# Altium PCB WS2812_20x30_3x4.PcbDoc
Units mm, origin at the board's own origin, x right, y up, seen from the top; angles counter-clockwise.
Board outline 91 x 81 mm, 2 copper layers (Top Layer, Bottom Layer); 96 components, 7 nets, 324 pads, 108 vias.
Unrouted connection lines stored in the file: 77.
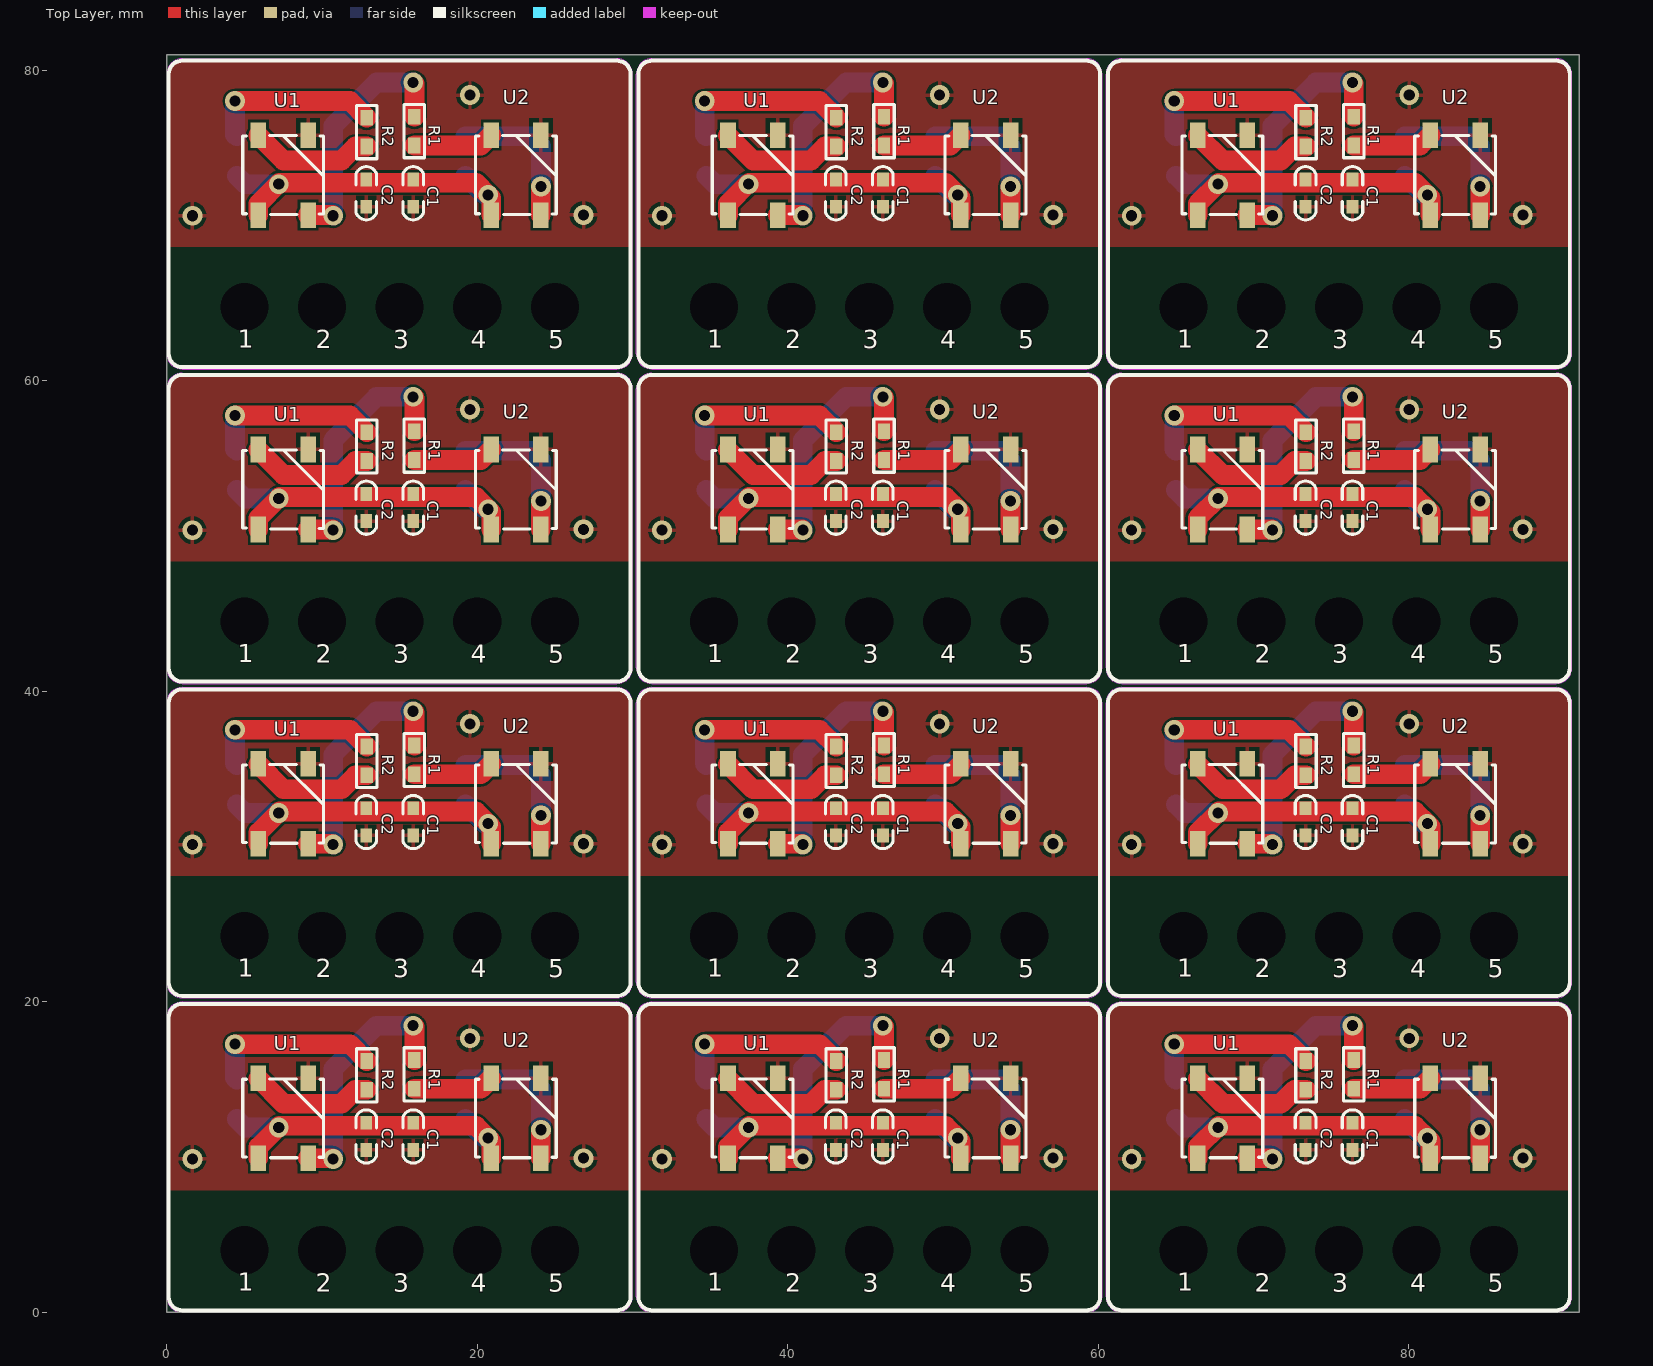
[diagram p0: Top Layer view]
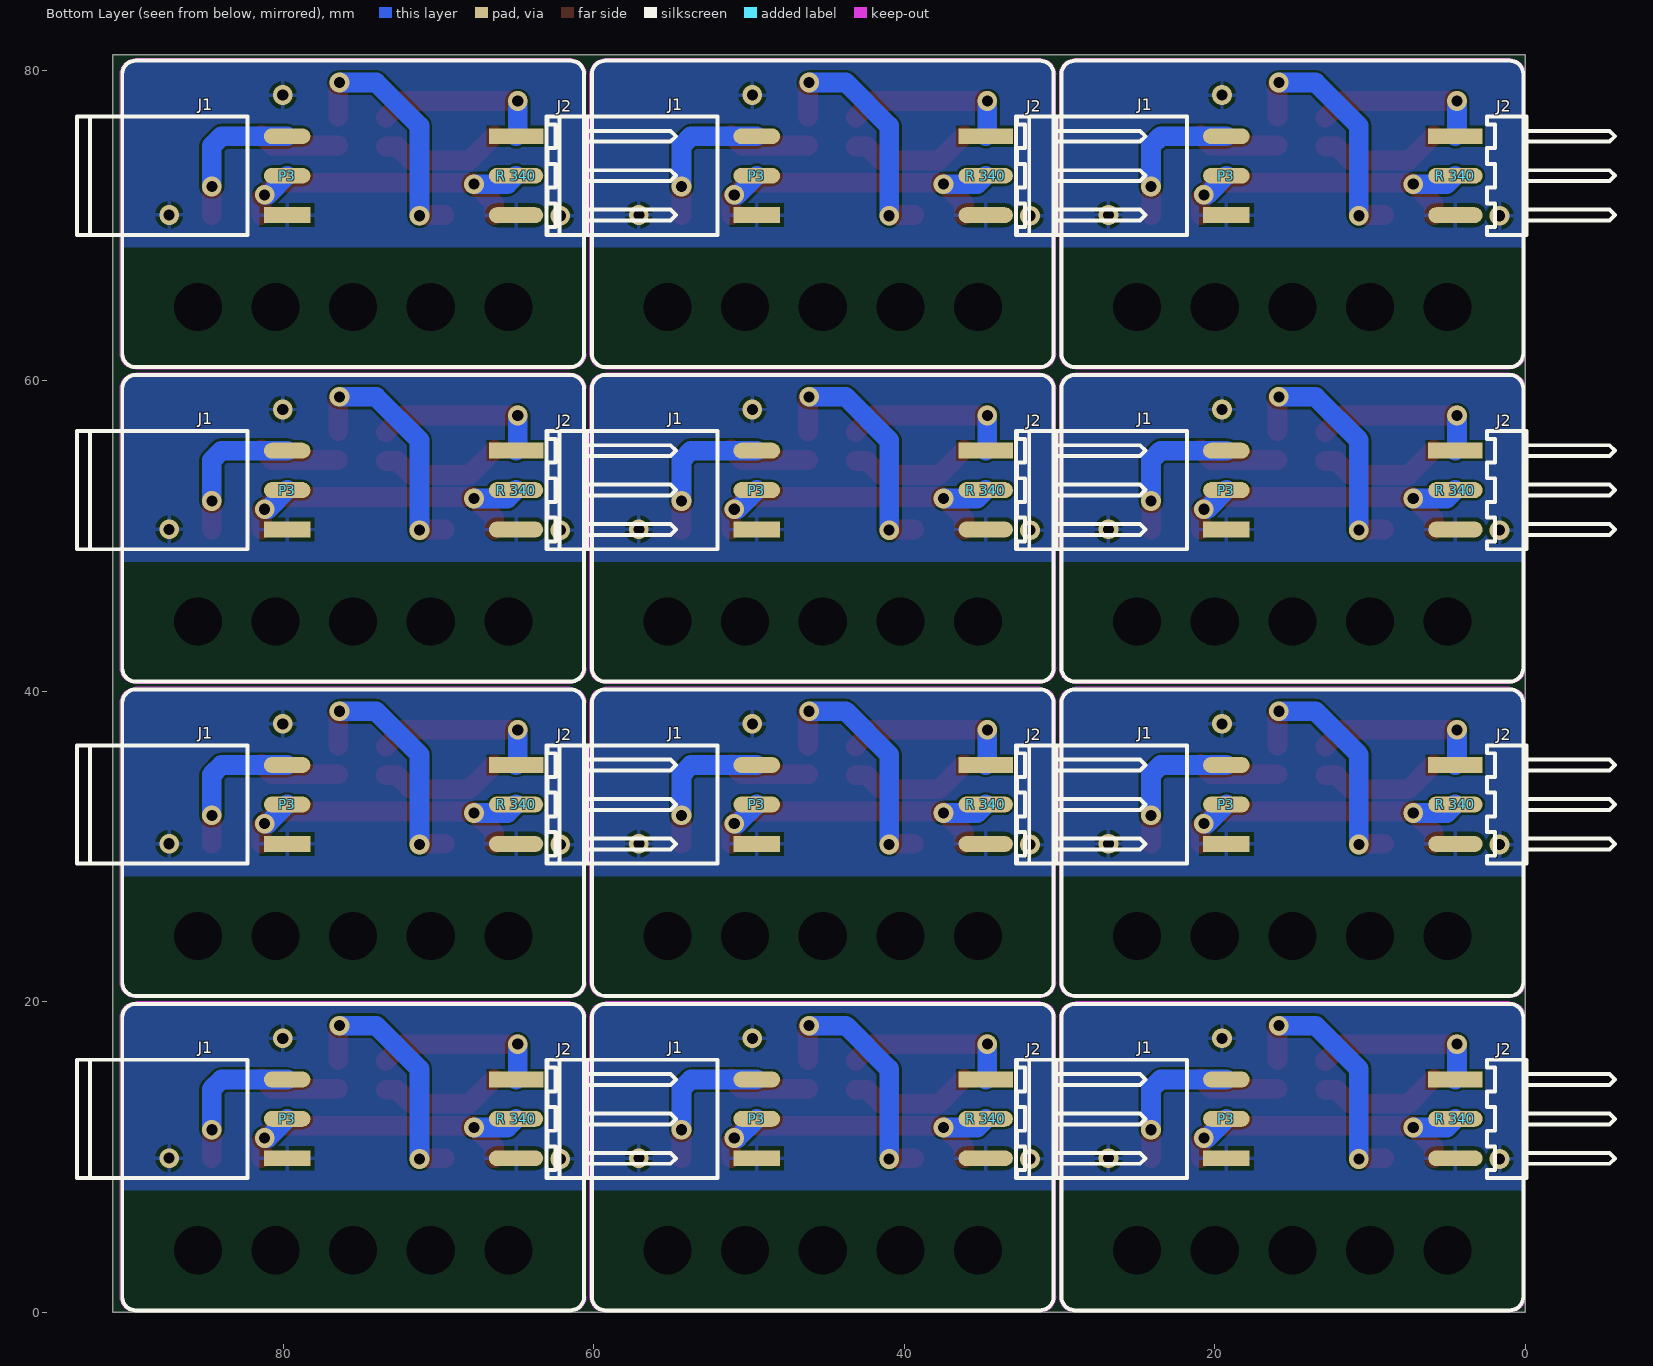
[diagram p1: Bottom Layer view, seen from below]

## Layer stack, top to bottom
Top Solder: solder mask 0.0102, Solder Resist, Dk 3.5
Top Layer: signal copper 0.0356
Dielectric 1: dielectric 0.32, FR-4, Dk 4.8
Bottom Layer: signal copper 0.0356
Bottom Solder: solder mask 0.0102, Solder Resist, Dk 3.5

## Board outline
0,0 0,81 91,81 91,0

## Design rules (kind name [scope] priority, off if disabled: settings)
Clearance [All] p1: gap=0.152
ComponentClearance [All] p1 off: gap=0 collisioncheckmode=3 verticalgap=2540 showdistances=FALSE
PolygonConnect [All] p1: connectstyle=Relief reliefconductorwidth=0.254 reliefentries=4 polygonreliefangle="90 Angle" airgapwidth=0.254
RoutingVias [All] p1: holewidth=0.711 width=1.27 viastyle="Through Hole" minholewidth=0.711 minwidth=1.27 maxholewidth=0.711 maxwidth=1.27
SilkToSilkClearance [All] p1: silktosilkclearance=0
SolderMaskExpansion [All] p1: expansion=0.102
Width [All] p1: maxlimit=2.54 minlimit=0.254 preferedwidth=0.254
28 further rules are at their usual default settings.

## Components (designator, comment, footprint, x,y, rotation, side; value= is the part's Value field where it differs from the comment)
C1 "Comment" "C 0603" 76.383,11.328 r270 top
C1 "Comment" "C 0603" 76.383,31.582 r270 top
C1 "Comment" "C 0603" 76.383,51.836 r270 top
C1 "Comment" "C 0603" 76.383,72.09 r270 top
C1 "Comment" "C 0603" 46.129,11.328 r270 top
C1 "Comment" "C 0603" 46.129,31.582 r270 top
C1 "Comment" "C 0603" 46.129,51.836 r270 top
C1 "Comment" "C 0603" 46.129,72.09 r270 top
C1 "Comment" "C 0603" 15.875,11.328 r270 top
C1 "Comment" "C 0603" 15.875,31.582 r270 top
C1 "Comment" "C 0603" 15.875,51.836 r270 top
C1 "Comment" "C 0603" 15.875,72.09 r270 top
C2 "Comment" "C 0603" 73.36,11.328 r270 top
C2 "Comment" "C 0603" 73.36,31.582 r270 top
C2 "Comment" "C 0603" 73.36,51.836 r270 top
C2 "Comment" "C 0603" 73.36,72.09 r270 top
C2 "Comment" "C 0603" 43.106,11.328 r270 top
C2 "Comment" "C 0603" 43.106,31.582 r270 top
C2 "Comment" "C 0603" 43.106,51.836 r270 top
C2 "Comment" "C 0603" 43.106,72.09 r270 top
C2 "Comment" "C 0603" 12.852,11.328 r270 top
C2 "Comment" "C 0603" 12.852,31.582 r270 top
C2 "Comment" "C 0603" 12.852,51.836 r270 top
C2 "Comment" "C 0603" 12.852,72.09 r270 top
P3 "Comment" "HDR2.54 S-W-3P_M" 79.758,9.92 r90 bottom locked
P3 "Comment" "HDR2.54 S-W-3P_M" 79.758,30.174 r90 bottom locked
P3 "Comment" "HDR2.54 S-W-3P_M" 79.758,50.428 r90 bottom locked
P3 "Comment" "HDR2.54 S-W-3P_M" 79.758,70.682 r90 bottom locked
P3 "Comment" "HDR2.54 S-W-3P_M" 49.504,9.92 r90 bottom locked
P3 "Comment" "HDR2.54 S-W-3P_M" 49.504,30.174 r90 bottom locked
P3 "Comment" "HDR2.54 S-W-3P_M" 49.504,50.428 r90 bottom locked
P3 "Comment" "HDR2.54 S-W-3P_M" 49.504,70.682 r90 bottom locked
P3 "Comment" "HDR2.54 S-W-3P_M" 19.25,9.92 r90 bottom locked
P3 "Comment" "HDR2.54 S-W-3P_M" 19.25,30.174 r90 bottom locked
P3 "Comment" "HDR2.54 S-W-3P_M" 19.25,50.428 r90 bottom locked
P3 "Comment" "HDR2.54 S-W-3P_M" 19.25,70.682 r90 bottom locked
R1 "1K" "R 0603" 76.459,15.329 r270 top
R1 "1K" "R 0603" 76.459,35.583 r270 top
R1 "1K" "R 0603" 76.459,55.837 r270 top
R1 "1K" "R 0603" 76.459,76.091 r270 top
R1 "1K" "R 0603" 46.205,15.329 r270 top
R1 "1K" "R 0603" 46.205,35.583 r270 top
R1 "1K" "R 0603" 46.205,55.837 r270 top
R1 "1K" "R 0603" 46.205,76.091 r270 top
R1 "1K" "R 0603" 15.951,15.329 r270 top
R1 "1K" "R 0603" 15.951,35.583 r270 top
R1 "1K" "R 0603" 15.951,55.837 r270 top
R1 "1K" "R 0603" 15.951,76.091 r270 top
R2 "1K" "R 0603" 73.386,15.265 r270 top (schematic designator R1)
R2 "1K" "R 0603" 73.386,35.519 r270 top (schematic designator R1)
R2 "1K" "R 0603" 73.386,55.773 r270 top (schematic designator R1)
R2 "1K" "R 0603" 73.386,76.027 r270 top (schematic designator R1)
R2 "1K" "R 0603" 43.132,15.265 r270 top (schematic designator R1)
R2 "1K" "R 0603" 43.132,35.519 r270 top (schematic designator R1)
R2 "1K" "R 0603" 43.132,55.773 r270 top (schematic designator R1)
R2 "1K" "R 0603" 43.132,76.027 r270 top (schematic designator R1)
R2 "1K" "R 0603" 12.878,15.265 r270 top (schematic designator R1)
R2 "1K" "R 0603" 12.878,35.519 r270 top (schematic designator R1)
R2 "1K" "R 0603" 12.878,55.773 r270 top (schematic designator R1)
R2 "1K" "R 0603" 12.878,76.027 r270 top (schematic designator R1)
"R 340" "Comment" "HDR2.54 S-W-3P" 65.008,15 r270 bottom locked
"R 340" "Comment" "HDR2.54 S-W-3P" 65.008,35.254 r270 bottom locked
"R 340" "Comment" "HDR2.54 S-W-3P" 65.008,55.508 r270 bottom locked
"R 340" "Comment" "HDR2.54 S-W-3P" 65.008,75.762 r270 bottom locked
"R 340" "Comment" "HDR2.54 S-W-3P" 34.754,15 r270 bottom locked
"R 340" "Comment" "HDR2.54 S-W-3P" 34.754,35.254 r270 bottom locked
"R 340" "Comment" "HDR2.54 S-W-3P" 34.754,55.508 r270 bottom locked
"R 340" "Comment" "HDR2.54 S-W-3P" 34.754,75.762 r270 bottom locked
"R 340" "Comment" "HDR2.54 S-W-3P" 4.5,15 r270 bottom locked
"R 340" "Comment" "HDR2.54 S-W-3P" 4.5,35.254 r270 bottom locked
"R 340" "Comment" "HDR2.54 S-W-3P" 4.5,55.508 r270 bottom locked
"R 340" "Comment" "HDR2.54 S-W-3P" 4.5,75.762 r270 bottom locked
U1 "WS2812B" WS2812B 68.008,12.5 r90 top locked
U1 "WS2812B" WS2812B 68.008,32.754 r90 top locked
U1 "WS2812B" WS2812B 68.008,53.008 r90 top locked
U1 "WS2812B" WS2812B 68.008,73.262 r90 top locked
U1 "WS2812B" WS2812B 37.754,12.5 r90 top locked
U1 "WS2812B" WS2812B 37.754,32.754 r90 top locked
U1 "WS2812B" WS2812B 37.754,53.008 r90 top locked
U1 "WS2812B" WS2812B 37.754,73.262 r90 top locked
U1 "WS2812B" WS2812B 7.5,12.5 r90 top locked
U1 "WS2812B" WS2812B 7.5,32.754 r90 top locked
U1 "WS2812B" WS2812B 7.5,53.008 r90 top locked
U1 "WS2812B" WS2812B 7.5,73.262 r90 top locked
U2 "WS2812B" WS2812B 83.008,12.5 r90 top locked (schematic designator U1)
U2 "WS2812B" WS2812B 83.008,32.754 r90 top locked (schematic designator U1)
U2 "WS2812B" WS2812B 83.008,53.008 r90 top locked (schematic designator U1)
U2 "WS2812B" WS2812B 83.008,73.262 r90 top locked (schematic designator U1)
U2 "WS2812B" WS2812B 52.754,12.5 r90 top locked (schematic designator U1)
U2 "WS2812B" WS2812B 52.754,32.754 r90 top locked (schematic designator U1)
U2 "WS2812B" WS2812B 52.754,53.008 r90 top locked (schematic designator U1)
U2 "WS2812B" WS2812B 52.754,73.262 r90 top locked (schematic designator U1)
U2 "WS2812B" WS2812B 22.5,12.5 r90 top locked (schematic designator U1)
U2 "WS2812B" WS2812B 22.5,32.754 r90 top locked (schematic designator U1)
U2 "WS2812B" WS2812B 22.5,53.008 r90 top locked (schematic designator U1)
U2 "WS2812B" WS2812B 22.5,73.262 r90 top locked (schematic designator U1)

## Footprints (in the part's own frame and the unit in brackets; to place one, negate y for a bottom-side part, rotate by r counter-clockwise, add the part's x,y. Pads: shape width x height; smd on the part's side, far side on the other; paste and mask are expansions set on the pad)
"C 0603" [mil] "无极性贴片电容"
  rect 35x30 smd: 1(-35,0) 2(34,0)
  silkscreen extent -67,-26 67,26, body extent -31,-16 31,16, height 32
"HDR2.54 S-W-3P" [mm] "3P卧式贴片排针2.54"
  rect 1.02x3.5 smd: 1(0,0)
  oval 1.02x3.5 smd: 2(2.54,0) 3(5.08,0)
  silkscreen extent -1.27,2.03 6.35,10.29, body extent -1.27,-0.76 6.35,10.34, height 2.54
"HDR2.54 S-W-3P_M" [mm] "3P卧式贴片排母2.54"
  rect 1.02x3 smd: 1(0,0)
  oval 1.02x3 smd: 2(2.54,0) 3(5.08,0)
  silkscreen extent -1.27,2.54 6.35,13.54, body extent -1.27,-0.43 6.35,13.54, height 2.54
"R 0603" [mil] "1/10W贴片电阻"
  rect 40x31.5 smd: 1(-36.5,0) 2(36.5,0)
  silkscreen extent -68,-26 68,26, body extent -31,-16 32,16, height 16
WS2812B [mm] "WS2812B"
  rect 1.651x1 smd: 1(-2.577,1.6) 2(-2.577,-1.6) 3(2.577,-1.6) 4(2.577,1.6)
  silkscreen extent -2.54,-2.59 2.54,2.62

## Part data
R1 R1 R1 R1 R1 R1 R1 R1 R1 R1 R1 R1 R2 R2 R2 R2 R2 R2 R2 R2 R2 R2 R2 R2: library part R, "贴片电阻"

## Free pads (board coordinates)
  round 0 hole 3.1: 0(5,4) 0(5,24.254) 0(5,44.508) 0(5,64.762) 0(35.254,4) 0(35.254,24.254) 0(35.254,44.508) 0(35.254,64.762) 0(65.508,4) 0(65.508,24.254) 0(65.508,44.508) 0(65.508,64.762) 1(10,4) 1(10,24.254) 1(10,44.508) 1(10,64.762) 1(40.254,4) 1(40.254,24.254) 1(40.254,44.508) 1(40.254,64.762) 1(70.508,4) 1(70.508,24.254) 1(70.508,44.508) 1(70.508,64.762) 2(15,4) 2(15,24.254) 2(15,44.508) 2(15,64.762) 2(45.254,4) 2(45.254,24.254) 2(45.254,44.508) 2(45.254,64.762) 2(75.508,4) 2(75.508,24.254) 2(75.508,44.508) 2(75.508,64.762) 3(20,4) 3(20,24.254) 3(20,44.508) 3(20,64.762) 3(50.254,4) 3(50.254,24.254) 3(50.254,44.508) 3(50.254,64.762) 3(80.508,4) 3(80.508,24.254) 3(80.508,44.508) 3(80.508,64.762) 4(25,4) 4(25,24.254) 4(25,44.508) 4(25,64.762) 4(55.254,4) 4(55.254,24.254) 4(55.254,44.508) 4(55.254,64.762) 4(85.508,4) 4(85.508,24.254) 4(85.508,44.508) 4(85.508,64.762)

## Via types
v1: diameter 1.27, hole 0.711, Top Layer to Bottom Layer, 108 vias

## Nets (pads, with @x,y where several pads share a name; then routed paths per layer and width w, separated by ;. In a path a pad name is that pad's centre, name@x,y a point inside that pad or via, vN(x,y) a via of type N, cw(c..) or ccw(c..) an arc to the next point about the centre after c; other vN are vias at no path point)
D1-1: R2.2 U1.4 | length 96.5
  Top Layer w1: U1.4@5.9,15.055 U1.4@5.9,15.077 ; U1.4@5.9,35.309 U1.4@5.9,35.331 ; U1.4@5.9,55.563 U1.4@5.9,55.585 ; U1.4@5.9,75.817 U1.4@5.9,75.839 ; U1.4@36.154,15.055 U1.4@36.154,15.077 ; U1.4@36.154,35.309 U1.4@36.154,35.331 ; U1.4@36.154,55.563 U1.4@36.154,55.585 ; U1.4@36.154,75.817 U1.4@36.154,75.839 ; U1.4@66.408,15.055 U1.4@66.408,15.077 ; U1.4@66.408,35.309 U1.4@66.408,35.331 ; U1.4@66.408,55.563 U1.4@66.408,55.585 ; U1.4@66.408,75.817 U1.4@66.408,75.839
  Top Layer w1.27: U1.4@5.9,15.055 7.518,13.437 11.252,13.437 12.154,14.338 R2.2@12.878,14.338 ; U1.4@5.9,35.309 7.518,33.691 11.252,33.691 12.154,34.592 R2.2@12.878,34.592 ; U1.4@5.9,55.563 7.518,53.945 11.252,53.945 12.154,54.846 R2.2@12.878,54.846 ; U1.4@5.9,75.817 7.518,74.199 11.252,74.199 12.154,75.1 R2.2@12.878,75.1 ; U1.4@36.154,15.055 37.772,13.437 41.506,13.437 42.408,14.338 R2.2@43.132,14.338 ; U1.4@36.154,35.309 37.772,33.691 41.506,33.691 42.408,34.592 R2.2@43.132,34.592 ; U1.4@36.154,55.563 37.772,53.945 41.506,53.945 42.408,54.846 R2.2@43.132,54.846 ; U1.4@36.154,75.817 37.772,74.199 41.506,74.199 42.408,75.1 R2.2@43.132,75.1 ; U1.4@66.408,15.055 68.026,13.437 71.76,13.437 72.662,14.338 R2.2@73.386,14.338 ; U1.4@66.408,35.309 68.026,33.691 71.76,33.691 72.662,34.592 R2.2@73.386,34.592 ; U1.4@66.408,55.563 68.026,53.945 71.76,53.945 72.662,54.846 R2.2@73.386,54.846 ; U1.4@66.408,75.817 68.026,74.199 71.76,74.199 72.662,75.1 R2.2@73.386,75.1
DI: "R 340.1" R2.1 | length 136.8
  Top Layer w1.27: v1(4.394,17.272) 11.798,17.272 R2.1@12.878,16.192 ; v1(4.394,37.526) 11.798,37.526 R2.1@12.878,36.447 ; v1(4.394,57.78) 11.798,57.78 R2.1@12.878,56.7 ; v1(4.394,78.034) 11.798,78.034 R2.1@12.878,76.955 ; v1(34.648,17.272) 42.052,17.272 R2.1@43.132,16.192 ; v1(34.648,37.526) 42.052,37.526 R2.1@43.132,36.447 ; v1(34.648,57.78) 42.052,57.78 R2.1@43.132,56.7 ; v1(34.648,78.034) 42.052,78.034 R2.1@43.132,76.955 ; v1(64.902,17.272) 72.306,17.272 R2.1@73.386,16.192 ; v1(64.902,37.526) 72.306,37.526 R2.1@73.386,36.447 ; v1(64.902,57.78) 72.306,57.78 R2.1@73.386,56.7 ; v1(64.902,78.034) 72.306,78.034 R2.1@73.386,76.955
  Bottom Layer w1: v1(4.394,17.272) v1@4.5,17.166 ; v1(4.394,37.526) v1@4.5,37.42 ; v1(4.394,57.78) v1@4.5,57.674 ; v1(4.394,78.034) v1@4.5,77.928 ; v1(34.648,17.272) v1@34.754,17.166 ; v1(34.648,37.526) v1@34.754,37.42 ; v1(34.648,57.78) v1@34.754,57.674 ; v1(34.648,78.034) v1@34.754,77.928 ; v1(64.902,17.272) v1@65.008,17.166 ; v1(64.902,37.526) v1@65.008,37.42 ; v1(64.902,57.78) v1@65.008,57.674 ; v1(64.902,78.034) v1@65.008,77.928
  Bottom Layer w1.27: v1(4.394,17.272) 4.394,15.106 4.5,15 ; v1(4.394,37.526) 4.394,35.36 4.5,35.254 ; v1(4.394,57.78) 4.394,55.614 4.5,55.508 ; v1(4.394,78.034) 4.394,75.868 4.5,75.762 ; v1(34.648,17.272) 34.648,15.106 34.754,15 ; v1(34.648,37.526) 34.648,35.36 34.754,35.254 ; v1(34.648,57.78) 34.648,55.614 34.754,55.508 ; v1(34.648,78.034) 34.648,75.868 34.754,75.762 ; v1(64.902,17.272) 64.902,15.106 65.008,15 ; v1(64.902,37.526) 64.902,35.36 65.008,35.254 ; v1(64.902,57.78) 64.902,55.614 65.008,55.508 ; v1(64.902,78.034) 64.902,75.868 65.008,75.762
DO: P3.3 U2.2 | length 114.8
  Top Layer w1: v1@24.1,11.756 v1(24.105,11.76) ; v1@24.1,32.01 v1(24.105,32.014) ; v1@24.1,52.264 v1(24.105,52.268) ; v1@24.1,72.518 v1(24.105,72.522) ; v1@54.354,11.756 v1(54.359,11.76) ; v1@54.354,32.01 v1(54.359,32.014) ; v1@54.354,52.264 v1(54.359,52.268) ; v1@54.354,72.518 v1(54.359,72.522) ; v1@84.608,11.756 v1(84.613,11.76) ; v1@84.608,32.01 v1(84.613,32.014) ; v1@84.608,52.264 v1(84.613,52.268) ; v1@84.608,72.518 v1(84.613,72.522)
  Top Layer w1.27: U2.2@24.1,9.923 v1@24.1,11.756 ; U2.2@24.1,30.177 v1@24.1,32.01 ; U2.2@24.1,50.431 v1@24.1,52.264 ; U2.2@24.1,70.685 v1@24.1,72.518 ; U2.2@54.354,9.923 v1@54.354,11.756 ; U2.2@54.354,30.177 v1@54.354,32.01 ; U2.2@54.354,50.431 v1@54.354,52.264 ; U2.2@54.354,70.685 v1@54.354,72.518 ; U2.2@84.608,9.923 v1@84.608,11.756 ; U2.2@84.608,30.177 v1@84.608,32.01 ; U2.2@84.608,50.431 v1@84.608,52.264 ; U2.2@84.608,70.685 v1@84.608,72.518
  Bottom Layer w1.27: P3.3@19.25,15 23.481,15 24.105,14.376 v1(24.105,11.76) ; P3.3@19.25,35.254 23.481,35.254 24.105,34.63 v1(24.105,32.014) ; P3.3@19.25,55.508 23.481,55.508 24.105,54.884 v1(24.105,52.268) ; P3.3@19.25,75.762 23.481,75.762 24.105,75.138 v1(24.105,72.522) ; P3.3@49.504,15 53.735,15 54.359,14.376 v1(54.359,11.76) ; P3.3@49.504,35.254 53.735,35.254 54.359,34.63 v1(54.359,32.014) ; P3.3@49.504,55.508 53.735,55.508 54.359,54.884 v1(54.359,52.268) ; P3.3@49.504,75.762 53.735,75.762 54.359,75.138 v1(54.359,72.522) ; P3.3@79.758,15 83.989,15 84.613,14.376 v1(84.613,11.76) ; P3.3@79.758,35.254 83.989,35.254 84.613,34.63 v1(84.613,32.014) ; P3.3@79.758,55.508 83.989,55.508 84.613,54.884 v1(84.613,52.268) ; P3.3@79.758,75.762 83.989,75.762 84.613,75.138 v1(84.613,72.522)
GND: "R 340.3" C1.2 C2.2 P3.1 U1.3 U2.3
  other v1: 1.651,9.881 31.905,9.881 62.159,9.881 26.848,9.931 57.102,9.931 87.356,9.931 19.533,17.653 49.787,17.653 80.041,17.653 1.651,30.135 31.905,30.135 62.159,30.135 26.848,30.185 57.102,30.185 87.356,30.185 19.533,37.907 49.787,37.907 80.041,37.907 1.651,50.389 31.905,50.389 62.159,50.389 26.848,50.439 57.102,50.439 87.356,50.439 19.533,58.161 49.787,58.161 80.041,58.161 1.651,70.643 31.905,70.643 62.159,70.643 26.848,70.693 57.102,70.693 87.356,70.693 19.533,78.415 49.787,78.415 80.041,78.415
U1-D01: R1.2 U2.4 | length 62.7
  Top Layer w1.27: R1.2@15.951,14.402 20.225,14.402 U2.4@20.9,15.077 ; R1.2@15.951,34.656 20.225,34.656 U2.4@20.9,35.331 ; R1.2@15.951,54.91 20.225,54.91 U2.4@20.9,55.585 ; R1.2@15.951,75.164 20.225,75.164 U2.4@20.9,75.839 ; R1.2@46.205,14.402 50.479,14.402 U2.4@51.154,15.077 ; R1.2@46.205,34.656 50.479,34.656 U2.4@51.154,35.331 ; R1.2@46.205,54.91 50.479,54.91 U2.4@51.154,55.585 ; R1.2@46.205,75.164 50.479,75.164 U2.4@51.154,75.839 ; R1.2@76.459,14.402 80.733,14.402 U2.4@81.408,15.077 ; R1.2@76.459,34.656 80.733,34.656 U2.4@81.408,35.331 ; R1.2@76.459,54.91 80.733,54.91 U2.4@81.408,55.585 ; R1.2@76.459,75.164 80.733,75.164 U2.4@81.408,75.839
U1_DO: R1.1 U1.2 | length 193.8
  Top Layer w1: v1@10.554,9.881 v1(10.719,9.881) v1@10.676,9.923 ; v1@10.554,30.135 v1(10.719,30.135) v1@10.676,30.177 ; v1@10.554,50.389 v1(10.719,50.389) v1@10.676,50.431 ; v1@10.554,70.643 v1(10.719,70.643) v1@10.676,70.685 ; v1(15.875,18.466) v1@15.951,18.39 ; v1(15.875,38.72) v1@15.951,38.644 ; v1(15.875,58.974) v1@15.951,58.898 ; v1(15.875,79.228) v1@15.951,79.152 ; v1@40.808,9.881 v1(40.973,9.881) v1@40.93,9.923 ; v1@40.808,30.135 v1(40.973,30.135) v1@40.93,30.177 ; v1@40.808,50.389 v1(40.973,50.389) v1@40.93,50.431 ; v1@40.808,70.643 v1(40.973,70.643) v1@40.93,70.685 ; v1(46.129,18.466) v1@46.205,18.39 ; v1(46.129,38.72) v1@46.205,38.644 ; v1(46.129,58.974) v1@46.205,58.898 ; v1(46.129,79.228) v1@46.205,79.152 ; v1@71.062,9.881 v1(71.227,9.881) v1@71.184,9.923 ; v1@71.062,30.135 v1(71.227,30.135) v1@71.184,30.177 ; v1@71.062,50.389 v1(71.227,50.389) v1@71.184,50.431 ; v1@71.062,70.643 v1(71.227,70.643) v1@71.184,70.685 ; v1(76.383,18.466) v1@76.459,18.39 ; v1(76.383,38.72) v1@76.459,38.644 ; v1(76.383,58.974) v1@76.459,58.898 ; v1(76.383,79.228) v1@76.459,79.152
  Top Layer w1.27: U1.2@9.1,9.923 v1@10.676,9.923 ; U1.2@9.1,30.177 v1@10.676,30.177 ; U1.2@9.1,50.431 v1@10.676,50.431 ; U1.2@9.1,70.685 v1@10.676,70.685 ; R1.1@15.951,16.256 v1@15.951,18.39 ; R1.1@15.951,36.51 v1@15.951,38.644 ; R1.1@15.951,56.764 v1@15.951,58.898 ; R1.1@15.951,77.018 v1@15.951,79.152 ; U1.2@39.354,9.923 v1@40.93,9.923 ; U1.2@39.354,30.177 v1@40.93,30.177 ; U1.2@39.354,50.431 v1@40.93,50.431 ; U1.2@39.354,70.685 v1@40.93,70.685 ; R1.1@46.205,16.256 v1@46.205,18.39 ; R1.1@46.205,36.51 v1@46.205,38.644 ; R1.1@46.205,56.764 v1@46.205,58.898 ; R1.1@46.205,77.018 v1@46.205,79.152 ; U1.2@69.608,9.923 v1@71.184,9.923 ; U1.2@69.608,30.177 v1@71.184,30.177 ; U1.2@69.608,50.431 v1@71.184,50.431 ; U1.2@69.608,70.685 v1@71.184,70.685 ; R1.1@76.459,16.256 v1@76.459,18.39 ; R1.1@76.459,36.51 v1@76.459,38.644 ; R1.1@76.459,56.764 v1@76.459,58.898 ; R1.1@76.459,77.018 v1@76.459,79.152
  Bottom Layer w1.27: v1(10.719,9.881) 10.719,15.672 13.513,18.466 v1(15.875,18.466) ; v1(10.719,30.135) 10.719,35.926 13.513,38.72 v1(15.875,38.72) ; v1(10.719,50.389) 10.719,56.18 13.513,58.974 v1(15.875,58.974) ; v1(10.719,70.643) 10.719,76.434 13.513,79.228 v1(15.875,79.228) ; v1(40.973,9.881) 40.973,15.672 43.767,18.466 v1(46.129,18.466) ; v1(40.973,30.135) 40.973,35.926 43.767,38.72 v1(46.129,38.72) ; v1(40.973,50.389) 40.973,56.18 43.767,58.974 v1(46.129,58.974) ; v1(40.973,70.643) 40.973,76.434 43.767,79.228 v1(46.129,79.228) ; v1(71.227,9.881) 71.227,15.672 74.021,18.466 v1(76.383,18.466) ; v1(71.227,30.135) 71.227,35.926 74.021,38.72 v1(76.383,38.72) ; v1(71.227,50.389) 71.227,56.18 74.021,58.974 v1(76.383,58.974) ; v1(71.227,70.643) 71.227,76.434 74.021,79.228 v1(76.383,79.228)
VCC: "R 340.2" C1.1 C2.1 P3.2 U1.1 U2.1 | length 272.1
  Top Layer w1.27: U1.1@5.9,9.923 5.9,10.65 v1@7.264,12.014 ; U1.1@5.9,30.177 5.9,30.904 v1@7.264,32.268 ; U1.1@5.9,50.431 5.9,51.158 v1@7.264,52.522 ; U1.1@5.9,70.685 5.9,71.412 v1@7.264,72.776 ; v1(7.214,11.913) 7.264,11.963 v1@7.264,12.014 ; v1(7.214,32.167) 7.264,32.217 v1@7.264,32.268 ; v1(7.214,52.421) 7.264,52.471 v1@7.264,52.522 ; v1(7.214,72.675) 7.264,72.725 v1@7.264,72.776 ; C2.1@12.852,12.014 v1@7.264,12.014 ; C2.1@12.852,32.268 v1@7.264,32.268 ; C2.1@12.852,52.522 v1@7.264,52.522 ; C2.1@12.852,72.776 v1@7.264,72.776 ; C2.1@13.005,12.014 19.914,12.014 v1(20.701,11.227) 20.9,11.028 U2.1@20.9,9.923 ; C2.1@13.005,32.268 19.914,32.268 v1(20.701,31.481) 20.9,31.282 U2.1@20.9,30.177 ; C2.1@13.005,52.522 19.914,52.522 v1(20.701,51.735) 20.9,51.536 U2.1@20.9,50.431 ; C2.1@13.005,72.776 19.914,72.776 v1(20.701,71.989) 20.9,71.79 U2.1@20.9,70.685 ; U1.1@36.154,9.923 36.154,10.65 v1@37.518,12.014 ; U1.1@36.154,30.177 36.154,30.904 v1@37.518,32.268 ; U1.1@36.154,50.431 36.154,51.158 v1@37.518,52.522 ; U1.1@36.154,70.685 36.154,71.412 v1@37.518,72.776 ; v1(37.468,11.913) 37.518,11.963 v1@37.518,12.014 ; v1(37.468,32.167) 37.518,32.217 v1@37.518,32.268 ; v1(37.468,52.421) 37.518,52.471 v1@37.518,52.522 ; v1(37.468,72.675) 37.518,72.725 v1@37.518,72.776 ; C2.1@43.106,12.014 v1@37.518,12.014 ; C2.1@43.106,32.268 v1@37.518,32.268 ; C2.1@43.106,52.522 v1@37.518,52.522 ; C2.1@43.106,72.776 v1@37.518,72.776 ; C2.1@43.259,12.014 50.168,12.014 v1(50.955,11.227) 51.154,11.028 U2.1@51.154,9.923 ; C2.1@43.259,32.268 50.168,32.268 v1(50.955,31.481) 51.154,31.282 U2.1@51.154,30.177 ; C2.1@43.259,52.522 50.168,52.522 v1(50.955,51.735) 51.154,51.536 U2.1@51.154,50.431 ; C2.1@43.259,72.776 50.168,72.776 v1(50.955,71.989) 51.154,71.79 U2.1@51.154,70.685 ; U1.1@66.408,9.923 66.408,10.65 v1@67.772,12.014 ; U1.1@66.408,30.177 66.408,30.904 v1@67.772,32.268 ; U1.1@66.408,50.431 66.408,51.158 v1@67.772,52.522 ; U1.1@66.408,70.685 66.408,71.412 v1@67.772,72.776 ; v1(67.722,11.913) 67.772,11.963 v1@67.772,12.014 ; v1(67.722,32.167) 67.772,32.217 v1@67.772,32.268 ; v1(67.722,52.421) 67.772,52.471 v1@67.772,52.522 ; v1(67.722,72.675) 67.772,72.725 v1@67.772,72.776 ; C2.1@73.36,12.014 v1@67.772,12.014 ; C2.1@73.36,32.268 v1@67.772,32.268 ; C2.1@73.36,52.522 v1@67.772,52.522 ; C2.1@73.36,72.776 v1@67.772,72.776 ; C2.1@73.513,12.014 80.422,12.014 v1(81.209,11.227) 81.408,11.028 U2.1@81.408,9.923 ; C2.1@73.513,32.268 80.422,32.268 v1(81.209,31.481) 81.408,31.282 U2.1@81.408,30.177 ; C2.1@73.513,52.522 80.422,52.522 v1(81.209,51.735) 81.408,51.536 U2.1@81.408,50.431 ; C2.1@73.513,72.776 80.422,72.776 v1(81.209,71.989) 81.408,71.79 U2.1@81.408,70.685
  Bottom Layer w1.27: 4.5,12.46 5.047,11.913 v1(7.214,11.913) ; 4.5,32.714 5.047,32.167 v1(7.214,32.167) ; 4.5,52.968 5.047,52.421 v1(7.214,52.421) ; 4.5,73.222 5.047,72.675 v1(7.214,72.675) ; P3.2@19.25,12.46 20.483,11.227 v1(20.701,11.227) ; P3.2@19.25,32.714 20.483,31.481 v1(20.701,31.481) ; P3.2@19.25,52.968 20.483,51.735 v1(20.701,51.735) ; P3.2@19.25,73.222 20.483,71.989 v1(20.701,71.989) ; 34.754,12.46 35.301,11.913 v1(37.468,11.913) ; 34.754,32.714 35.301,32.167 v1(37.468,32.167) ; 34.754,52.968 35.301,52.421 v1(37.468,52.421) ; 34.754,73.222 35.301,72.675 v1(37.468,72.675) ; P3.2@49.504,12.46 50.737,11.227 v1(50.955,11.227) ; P3.2@49.504,32.714 50.737,31.481 v1(50.955,31.481) ; P3.2@49.504,52.968 50.737,51.735 v1(50.955,51.735) ; P3.2@49.504,73.222 50.737,71.989 v1(50.955,71.989) ; 65.008,12.46 65.555,11.913 v1(67.722,11.913) ; 65.008,32.714 65.555,32.167 v1(67.722,32.167) ; 65.008,52.968 65.555,52.421 v1(67.722,52.421) ; 65.008,73.222 65.555,72.675 v1(67.722,72.675) ; P3.2@79.758,12.46 80.991,11.227 v1(81.209,11.227) ; P3.2@79.758,32.714 80.991,31.481 v1(81.209,31.481) ; P3.2@79.758,52.968 80.991,51.735 v1(81.209,51.735) ; P3.2@79.758,73.222 80.991,71.989 v1(81.209,71.989)

## Polygon pours and split planes (outlines as drawn)
GND on Bottom Layer "GND" (solid, remove dead copper, pour order 138): 60.508,20 90.508,20 90.508,7.849 60.508,7.849
GND on Bottom Layer "GND" (solid, remove dead copper, pour order 136): 60.508,40.254 90.508,40.254 90.508,28.103 60.508,28.103
GND on Bottom Layer "GND" (solid, remove dead copper, pour order 134): 60.508,60.508 90.508,60.508 90.508,48.357 60.508,48.357
GND on Bottom Layer "GND" (solid, remove dead copper, pour order 132): 60.508,80.762 90.508,80.762 90.508,68.611 60.508,68.611
GND on Bottom Layer "GND" (solid, remove dead copper, pour order 122): 30.254,20 60.254,20 60.254,7.849 30.254,7.849
GND on Bottom Layer "GND" (solid, remove dead copper, pour order 120): 30.254,40.254 60.254,40.254 60.254,28.103 30.254,28.103
GND on Bottom Layer "GND" (solid, remove dead copper, pour order 118): 30.254,60.508 60.254,60.508 60.254,48.357 30.254,48.357
GND on Bottom Layer "GND" (solid, remove dead copper, pour order 116): 30.254,80.762 60.254,80.762 60.254,68.611 30.254,68.611
GND on Bottom Layer "GND" (solid, remove dead copper, pour order 106): 0,20 30,20 30,7.849 0,7.849
GND on Bottom Layer "GND" (solid, remove dead copper, pour order 104): 0,40.254 30,40.254 30,28.103 0,28.103
GND on Bottom Layer "GND" (solid, remove dead copper, pour order 102): 0,60.508 30,60.508 30,48.357 0,48.357
GND on Bottom Layer "GND" (solid, remove dead copper, pour order 100): 0,80.762 30,80.762 30,68.611 0,68.611
GND on Top Layer "GND" (solid, remove dead copper, pour order 146): 60.508,20 60.508,7.874 90.508,7.874 90.508,20
GND on Top Layer "GND" (solid, remove dead copper, pour order 144): 60.508,40.254 60.508,28.128 90.508,28.128 90.508,40.254
GND on Top Layer "GND" (solid, remove dead copper, pour order 142): 60.508,60.508 60.508,48.382 90.508,48.382 90.508,60.508
GND on Top Layer "GND" (solid, remove dead copper, pour order 140): 60.508,80.762 60.508,68.636 90.508,68.636 90.508,80.762
GND on Top Layer "GND" (solid, remove dead copper, pour order 130): 30.254,20 30.254,7.874 60.254,7.874 60.254,20
GND on Top Layer "GND" (solid, remove dead copper, pour order 128): 30.254,40.254 30.254,28.128 60.254,28.128 60.254,40.254
GND on Top Layer "GND" (solid, remove dead copper, pour order 126): 30.254,60.508 30.254,48.382 60.254,48.382 60.254,60.508
GND on Top Layer "GND" (solid, remove dead copper, pour order 124): 30.254,80.762 30.254,68.636 60.254,68.636 60.254,80.762
GND on Top Layer "GND" (solid, remove dead copper, pour order 114): 0,20 0,7.874 30,7.874 30,20
GND on Top Layer "GND" (solid, remove dead copper, pour order 112): 0,40.254 0,28.128 30,28.128 30,40.254
GND on Top Layer "GND" (solid, remove dead copper, pour order 110): 0,60.508 0,48.382 30,48.382 30,60.508
GND on Top Layer "GND" (solid, remove dead copper, pour order 108): 0,80.762 0,68.636 30,68.636 30,80.762

## Keep-outs
Keep-Out Layer:
  lines w0.025: 0,1 ccw(c1,1) 1,0 29,0 ccw(c29,1) 30,1 30,19 ccw(c29,19) 29,20 1,20 ccw(c1,19) 0,19 0,1 ; 0,21.254 ccw(c1,21.254) 1,20.254 29,20.254 ccw(c29,21.254) 30,21.254 30,39.254 ccw(c29,39.254) 29,40.254 1,40.254 ccw(c1,39.254) 0,39.254 0,21.254 ; 0,41.508 ccw(c1,41.508) 1,40.508 29,40.508 ccw(c29,41.508) 30,41.508 30,59.508 ccw(c29,59.508) 29,60.508 1,60.508 ccw(c1,59.508) 0,59.508 0,41.508 ; 0,61.762 ccw(c1,61.762) 1,60.762 29,60.762 ccw(c29,61.762) 30,61.762 30,79.762 ccw(c29,79.762) 29,80.762 1,80.762 ccw(c1,79.762) 0,79.762 0,61.762 ; 30.254,1 ccw(c31.254,1) 31.254,0 59.254,0 ccw(c59.254,1) 60.254,1 60.254,19 ccw(c59.254,19) 59.254,20 31.254,20 ccw(c31.254,19) 30.254,19 30.254,1 ; 30.254,21.254 ccw(c31.254,21.254) 31.254,20.254 59.254,20.254 ccw(c59.254,21.254) 60.254,21.254 60.254,39.254 ccw(c59.254,39.254) 59.254,40.254 31.254,40.254 ccw(c31.254,39.254) 30.254,39.254 30.254,21.254 ; 30.254,41.508 ccw(c31.254,41.508) 31.254,40.508 59.254,40.508 ccw(c59.254,41.508) 60.254,41.508 60.254,59.508 ccw(c59.254,59.508) 59.254,60.508 31.254,60.508 ccw(c31.254,59.508) 30.254,59.508 30.254,41.508 ; 30.254,61.762 ccw(c31.254,61.762) 31.254,60.762 59.254,60.762 ccw(c59.254,61.762) 60.254,61.762 60.254,79.762 ccw(c59.254,79.762) 59.254,80.762 31.254,80.762 ccw(c31.254,79.762) 30.254,79.762 30.254,61.762 ; 60.508,1 ccw(c61.508,1) 61.508,0 89.508,0 ccw(c89.508,1) 90.508,1 90.508,19 ccw(c89.508,19) 89.508,20 61.508,20 ccw(c61.508,19) 60.508,19 60.508,1 ; 60.508,21.254 ccw(c61.508,21.254) 61.508,20.254 89.508,20.254 ccw(c89.508,21.254) 90.508,21.254 90.508,39.254 ccw(c89.508,39.254) 89.508,40.254 61.508,40.254 ccw(c61.508,39.254) 60.508,39.254 60.508,21.254 ; 60.508,41.508 ccw(c61.508,41.508) 61.508,40.508 89.508,40.508 ccw(c89.508,41.508) 90.508,41.508 90.508,59.508 ccw(c89.508,59.508) 89.508,60.508 61.508,60.508 ccw(c61.508,59.508) 60.508,59.508 60.508,41.508 ; 60.508,61.762 ccw(c61.508,61.762) 61.508,60.762 89.508,60.762 ccw(c89.508,61.762) 90.508,61.762 90.508,79.762 ccw(c89.508,79.762) 89.508,80.762 61.508,80.762 ccw(c61.508,79.762) 60.508,79.762 60.508,61.762

## Silkscreen, mask and mechanical layers (free items; w line width, h text height)
Top Overlay:
  lines w0.254: 0.127,0.914 0.127,19 cw(c1,19) 1,19.873 29,19.873 cw(c29,19) 29.873,19 29.873,1 cw(c29,1) 29,0.127 ; 0.127,1 ccw(c1,1) 1,0.127 ; 0.127,21.168 0.127,39.254 cw(c1,39.254) 1,40.127 29,40.127 cw(c29,39.254) 29.873,39.254 29.873,21.254 cw(c29,21.254) 29,20.381 ; 0.127,21.254 ccw(c1,21.254) 1,20.381 ; 0.127,41.422 0.127,59.508 cw(c1,59.508) 1,60.381 29,60.381 cw(c29,59.508) 29.873,59.508 29.873,41.508 cw(c29,41.508) 29,40.635 ; 0.127,41.508 ccw(c1,41.508) 1,40.635 ; 0.127,61.676 0.127,79.762 cw(c1,79.762) 1,80.635 29,80.635 cw(c29,79.762) 29.873,79.762 29.873,61.762 cw(c29,61.762) 29,60.889 ; 0.127,61.762 ccw(c1,61.762) 1,60.889 ; 1.092,0.127 29.058,0.127 ; 1.092,20.381 29.058,20.381 ; 1.092,40.635 29.058,40.635 ; 1.092,60.889 29.058,60.889 ; 30.381,0.914 30.381,19 cw(c31.254,19) 31.254,19.873 59.254,19.873 cw(c59.254,19) 60.127,19 60.127,1 cw(c59.254,1) 59.254,0.127 ; 30.381,1 ccw(c31.254,1) 31.254,0.127 ; 30.381,21.168 30.381,39.254 cw(c31.254,39.254) 31.254,40.127 59.254,40.127 cw(c59.254,39.254) 60.127,39.254 60.127,21.254 cw(c59.254,21.254) 59.254,20.381 ; 30.381,21.254 ccw(c31.254,21.254) 31.254,20.381 ; 30.381,41.422 30.381,59.508 cw(c31.254,59.508) 31.254,60.381 59.254,60.381 cw(c59.254,59.508) 60.127,59.508 60.127,41.508 cw(c59.254,41.508) 59.254,40.635 ; 30.381,41.508 ccw(c31.254,41.508) 31.254,40.635 ; 30.381,61.676 30.381,79.762 cw(c31.254,79.762) 31.254,80.635 59.254,80.635 cw(c59.254,79.762) 60.127,79.762 60.127,61.762 cw(c59.254,61.762) 59.254,60.889 ; 30.381,61.762 ccw(c31.254,61.762) 31.254,60.889 ; 31.346,0.127 59.312,0.127 ; 31.346,20.381 59.312,20.381 ; 31.346,40.635 59.312,40.635 ; 31.346,60.889 59.312,60.889 ; 60.635,0.914 60.635,19 cw(c61.508,19) 61.508,19.873 89.508,19.873 cw(c89.508,19) 90.381,19 90.381,1 cw(c89.508,1) 89.508,0.127 ; 60.635,1 ccw(c61.508,1) 61.508,0.127 ; 60.635,21.168 60.635,39.254 cw(c61.508,39.254) 61.508,40.127 89.508,40.127 cw(c89.508,39.254) 90.381,39.254 90.381,21.254 cw(c89.508,21.254) 89.508,20.381 ; 60.635,21.254 ccw(c61.508,21.254) 61.508,20.381 ; 60.635,41.422 60.635,59.508 cw(c61.508,59.508) 61.508,60.381 89.508,60.381 cw(c89.508,59.508) 90.381,59.508 90.381,41.508 cw(c89.508,41.508) 89.508,40.635 ; 60.635,41.508 ccw(c61.508,41.508) 61.508,40.635 ; 60.635,61.676 60.635,79.762 cw(c61.508,79.762) 61.508,80.635 89.508,80.635 cw(c89.508,79.762) 90.381,79.762 90.381,61.762 cw(c89.508,61.762) 89.508,60.889 ; 60.635,61.762 ccw(c61.508,61.762) 61.508,60.889 ; 61.6,0.127 89.566,0.127 ; 61.6,20.381 89.566,20.381 ; 61.6,40.635 89.566,40.635 ; 61.6,60.889 89.566,60.889
  text "1" at 4.572,61.753 h2
  text "1" at 34.826,61.753 h2
  text "1" at 65.08,61.753 h2
  text "2" at 9.584,61.711 h2
  text "3" at 14.584,61.711 h2
  text "4" at 19.584,61.711 h2
  text "5" at 24.584,61.711 h2
  text "2" at 39.838,61.711 h2
  text "3" at 44.838,61.711 h2
  text "4" at 49.838,61.711 h2
  text "5" at 54.838,61.711 h2
  text "2" at 70.092,61.711 h2
  text "3" at 75.092,61.711 h2
  text "4" at 80.092,61.711 h2
  text "5" at 85.092,61.711 h2
  text "1" at 4.572,41.499 h2
  text "1" at 34.826,41.499 h2
  text "1" at 65.08,41.499 h2
  text "2" at 9.584,41.457 h2
  text "3" at 14.584,41.457 h2
  text "4" at 19.584,41.457 h2
  text "5" at 24.584,41.457 h2
  text "2" at 39.838,41.457 h2
  text "3" at 44.838,41.457 h2
  text "4" at 49.838,41.457 h2
  text "5" at 54.838,41.457 h2
  text "2" at 70.092,41.457 h2
  text "3" at 75.092,41.457 h2
  text "4" at 80.092,41.457 h2
  text "5" at 85.092,41.457 h2
  text "1" at 4.572,21.245 h2
  text "1" at 34.826,21.245 h2
  text "1" at 65.08,21.245 h2
  text "2" at 9.584,21.203 h2
  text "3" at 14.584,21.203 h2
  text "4" at 19.584,21.203 h2
  text "5" at 24.584,21.203 h2
  text "2" at 39.838,21.203 h2
  text "3" at 44.838,21.203 h2
  text "4" at 49.838,21.203 h2
  text "5" at 54.838,21.203 h2
  text "2" at 70.092,21.203 h2
  text "3" at 75.092,21.203 h2
  text "4" at 80.092,21.203 h2
  text "5" at 85.092,21.203 h2
  text "1" at 4.572,0.991 h2
  text "1" at 34.826,0.991 h2
  text "1" at 65.08,0.991 h2
  text "2" at 9.584,0.949 h2
  text "3" at 14.584,0.949 h2
  text "4" at 19.584,0.949 h2
  text "5" at 24.584,0.949 h2
  text "2" at 39.838,0.949 h2
  text "3" at 44.838,0.949 h2
  text "4" at 49.838,0.949 h2
  text "5" at 54.838,0.949 h2
  text "2" at 70.092,0.949 h2
  text "3" at 75.092,0.949 h2
  text "4" at 80.092,0.949 h2
  text "5" at 85.092,0.949 h2
Bottom Overlay:
  lines w0.254: 0.127,0.914 0.127,19 cw(c1,19) 1,19.873 29,19.873 cw(c29,19) 29.873,19 29.873,1 cw(c29,1) 29,0.127 1,0.127 cw(c1,1) 0.127,1 ; 0.127,21.168 0.127,39.254 cw(c1,39.254) 1,40.127 29,40.127 cw(c29,39.254) 29.873,39.254 29.873,21.254 cw(c29,21.254) 29,20.381 1,20.381 cw(c1,21.254) 0.127,21.254 ; 0.127,41.422 0.127,59.508 cw(c1,59.508) 1,60.381 29,60.381 cw(c29,59.508) 29.873,59.508 29.873,41.508 cw(c29,41.508) 29,40.635 1,40.635 cw(c1,41.508) 0.127,41.508 ; 0.127,61.676 0.127,79.762 cw(c1,79.762) 1,80.635 29,80.635 cw(c29,79.762) 29.873,79.762 29.873,61.762 cw(c29,61.762) 29,60.889 1,60.889 cw(c1,61.762) 0.127,61.762 ; 30.381,0.914 30.381,19 cw(c31.254,19) 31.254,19.873 59.254,19.873 cw(c59.254,19) 60.127,19 60.127,1 cw(c59.254,1) 59.254,0.127 31.254,0.127 cw(c31.254,1) 30.381,1 ; 30.381,21.168 30.381,39.254 cw(c31.254,39.254) 31.254,40.127 59.254,40.127 cw(c59.254,39.254) 60.127,39.254 60.127,21.254 cw(c59.254,21.254) 59.254,20.381 31.254,20.381 cw(c31.254,21.254) 30.381,21.254 ; 30.381,41.422 30.381,59.508 cw(c31.254,59.508) 31.254,60.381 59.254,60.381 cw(c59.254,59.508) 60.127,59.508 60.127,41.508 cw(c59.254,41.508) 59.254,40.635 31.254,40.635 cw(c31.254,41.508) 30.381,41.508 ; 30.381,61.676 30.381,79.762 cw(c31.254,79.762) 31.254,80.635 59.254,80.635 cw(c59.254,79.762) 60.127,79.762 60.127,61.762 cw(c59.254,61.762) 59.254,60.889 31.254,60.889 cw(c31.254,61.762) 30.381,61.762 ; 60.635,0.914 60.635,19 cw(c61.508,19) 61.508,19.873 89.508,19.873 cw(c89.508,19) 90.381,19 90.381,1 cw(c89.508,1) 89.508,0.127 61.508,0.127 cw(c61.508,1) 60.635,1 ; 60.635,21.168 60.635,39.254 cw(c61.508,39.254) 61.508,40.127 89.508,40.127 cw(c89.508,39.254) 90.381,39.254 90.381,21.254 cw(c89.508,21.254) 89.508,20.381 61.508,20.381 cw(c61.508,21.254) 60.635,21.254 ; 60.635,41.422 60.635,59.508 cw(c61.508,59.508) 61.508,60.381 89.508,60.381 cw(c89.508,59.508) 90.381,59.508 90.381,41.508 cw(c89.508,41.508) 89.508,40.635 61.508,40.635 cw(c61.508,41.508) 60.635,41.508 ; 60.635,61.676 60.635,79.762 cw(c61.508,79.762) 61.508,80.635 89.508,80.635 cw(c89.508,79.762) 90.381,79.762 90.381,61.762 cw(c89.508,61.762) 89.508,60.889 61.508,60.889 cw(c61.508,61.762) 60.635,61.762
  text "J1" at 24.994,77.45 h0.76
  text "J1" at 55.248,77.45 h0.76
  text "J1" at 85.502,77.45 h0.76
  text "J2" at 1.88,77.348 h0.76
  text "J2" at 32.134,77.348 h0.76
  text "J2" at 62.388,77.348 h0.76
  text "J1" at 24.994,57.196 h0.76
  text "J1" at 55.248,57.196 h0.76
  text "J1" at 85.502,57.196 h0.76
  text "J2" at 1.88,57.094 h0.76
  text "J2" at 32.134,57.094 h0.76
  text "J2" at 62.388,57.094 h0.76
  text "J1" at 24.994,36.942 h0.76
  text "J1" at 55.248,36.942 h0.76
  text "J1" at 85.502,36.942 h0.76
  text "J2" at 1.88,36.84 h0.76
  text "J2" at 32.134,36.84 h0.76
  text "J2" at 62.388,36.84 h0.76
  text "J1" at 24.994,16.688 h0.76
  text "J1" at 55.248,16.688 h0.76
  text "J1" at 85.502,16.688 h0.76
  text "J2" at 1.88,16.586 h0.76
  text "J2" at 32.134,16.586 h0.76
  text "J2" at 62.388,16.586 h0.76